# Altium PCB MAINSSMB V1.2 .PcbDoc (part 2 of 2)
Units mm, origin at the board's own origin, x right, y up, seen from the top; angles counter-clockwise.
Board outline 44.2 x 67.56 mm, 2 copper layers (Top Layer, Bottom Layer), stack 1.871 mm thick; 45 components, 33 nets, 168 pads, 12 vias.
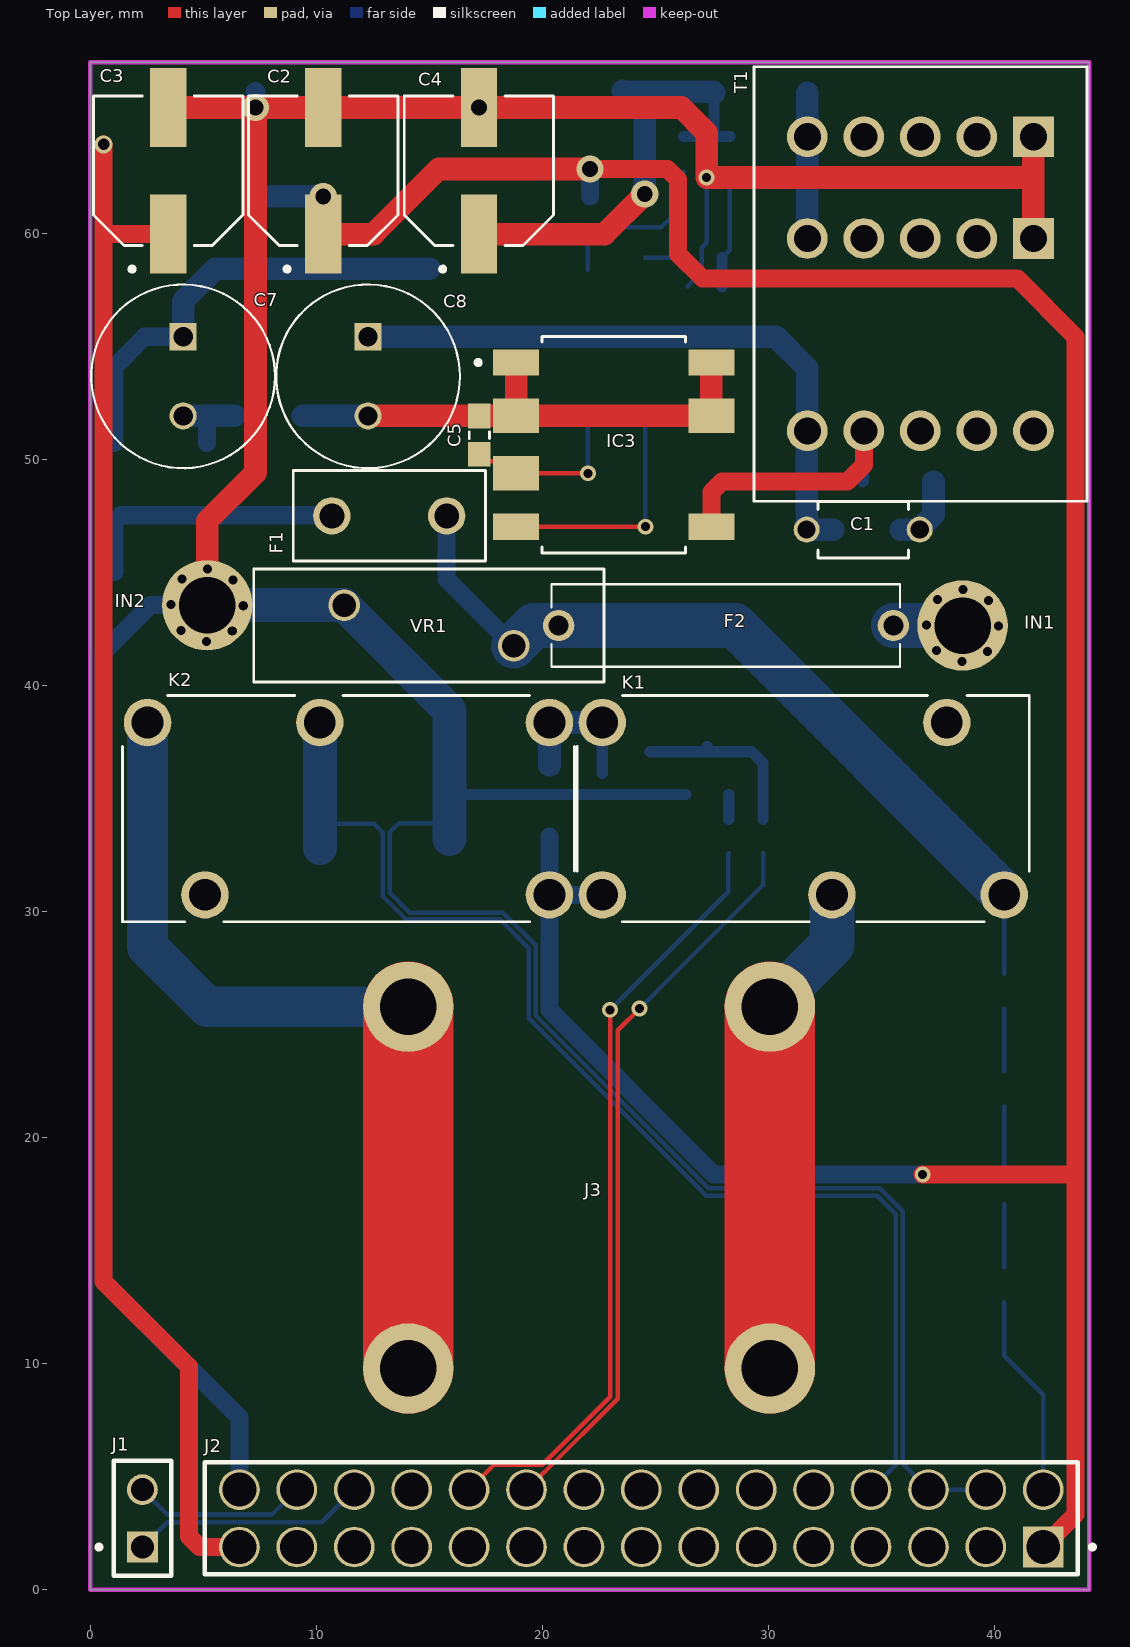
[diagram p0: Top Layer view]

## Via types
v1: diameter 0.7, hole 0.4, Top Layer to Bottom Layer, tented both sides, 6 vias
v2: diameter 1.2, hole 0.7, Top Layer to Bottom Layer, tented both sides, 5 vias
v3: diameter 0.8, hole 0.5, Top Layer to Bottom Layer, tented both sides, 1 vias

## Nets (pads, with @x,y where several pads share a name; then routed paths per layer and width w, separated by ;. In a path a pad name is that pad's centre, name@x,y a point inside that pad or via, vN(x,y) a via of type N, cw(c..) or ccw(c..) an arc to the next point about the centre after c; other vN are vias at no path point)
3V3-MAIN: C3.1 IC1.4 J2.29 | length 68.4
  Top Layer w0.8: v3(0.6,63.932) 0.6,59.919 ; C3.1 0.645,59.963 0.6,59.919 ; J2.29 4.837,1.88 4.369,2.348 4.369,9.855 0.6,13.624 0.6,59.919
5V-MAIN: C2.1 D5.K IC1.3 IC7.3 J2.01 K1.A2 K2.A1 | length 135.8
  Top Layer w0.8: v2(22.106,62.84) 25.541,62.84 26.01,62.371 26.01,59.08 27.102,57.988 41.021,57.988 43.596,55.413 43.596,18.364 ; v1(36.83,18.364) 43.596,18.364 ; J2.01 43.596,3.312 43.596,18.364
  Top Layer w1: v2(10.312,61.632) C2.1 12.542,59.963 15.418,62.84 v2(22.106,62.84)
  Bottom Layer w0.8: D5.K K2.A1 ; IC7.3 v2(22.106,62.84) ; K1.A2 20.93,30.734 K2.A1 ; v1(36.83,18.364) 27.584,18.364 20.32,25.629 K2.A1
  Bottom Layer w1: IC1.3 v2(10.312,61.632)
CUR-SHT-1: J2.08 K2.COM R17.2 R19.2 | length 55
  Bottom Layer w0.2: R19.2 10.16,33.167 10.87,33.877 12.554,33.877 12.954,33.477 12.954,30.658 13.97,29.642 18.136,29.642 19.406,28.372 19.406,25.27 27.251,17.424 34.823,17.424 35.641,16.607 35.641,5.517 J2.08
  Bottom Layer w1.5: R19.2 10.16,33.877 R17.2 K2.COM
LD-IN1: J1.02 J2.28 R9.1 | length 7.7
  Bottom Layer w0.2: J1.02 3.411,3.32 8.044,3.32 J2.28
LD-IN2: J1.01 J2.26 R9.2 | length 10.4
  Bottom Layer w0.2: J1.01 2.896,2.465 3.411,2.98 10.244,2.98 J2.26
NetC1_1: C1.1 D3.K R1.1 | length 3.2
  Bottom Layer w1: R1.1@35.862,46.888 C1.1 36.699,46.929 37.308,47.538 D3.K
NetC4_1: C4.1 D2.1 IC7.1 R2.2 R3.2 | length 20.7
  Top Layer w1: C4.1 22.76,59.963 v2(24.536,61.74)
  Bottom Layer w0.5: R2.2 R3.2 ; 27.598,64.313 D2.1
  Bottom Layer w1: IC7.1@23.554,66.308 23.599,66.263 24.46,66.263 ; v2(24.536,61.74) 24.536,66.187 24.46,66.263 ; D2.1 27.553,66.263 24.46,66.263
NetC5_1: C5.1 IC3.3 IC4.4 | length 8.1
  Top Layer w0.2: C5.1 17.53,49.911 18.316,49.911 IC3.3 v1(22.022,49.38)
  Bottom Layer w0.2: IC4.4 22.022,49.454 v1@22.073,49.403
NetC9_1: C9.1 IC4.2 IC5.2 | length 2.8
  Bottom Layer w0.2: IC4.2@24.562,58.92 C9.1 IC5.2
NetC9_2: C9.2 IC5.1 R3.1 R4.2 | length 5.3
  Bottom Layer w0.2: C9.2 28.292,59.26 IC5.1 R3.1
  Bottom Layer w0.5: R4.2 C9.2
NetD1_AC1: D1.AC1 F1.2 | length 12
  Bottom Layer w0.8: D1.AC1 1.074,45.21 1.074,47.231 1.367,47.523 F1.2@10.693,47.523
NetD2_2: D2.2 T1.5 | length 6.5
  Bottom Layer w1: T1.5@31.728,59.766 31.728,64.266 D2.2
NetD3_A: D3.A IC3.5 T1.7 | length 12.6
  Top Layer w0.8: IC3.5 27.483,48.553 27.951,49.022 33.503,49.022 34.228,49.748 T1.7
  Bottom Layer w0.5: D3.A 34.198,49.027 34.198,51.226 T1.7
NetD5_A: D5.A K1.A1 K2.A2 Q1.3 | length 6.5
  Bottom Layer w0.5: Q1.3 K1.A1
  Bottom Layer w1: D5.A K2.A2 K1.A1
NetF2_1: F2.1 IN1.1 | length 3.1
  Bottom Layer w2: F2.1 IN1.1@38.593,42.647
NetIC3_4: IC3.4 IC4.3 | length 11.2
  Top Layer w0.2: IC3.4 v1(24.562,47.018) ; v1@24.47,47.11 24.553,47.193 v1@24.689,47.193
  Bottom Layer w0.2: IC4.3 24.562,47.249 24.618,47.193 v1@24.689,47.193
NetIC4_1: IC4.1 R2.1 | length 7.8
  Bottom Layer w0.2: IC4.1 22.022,59.995 22.301,60.274 25.273,60.274 26.252,61.253 R2.1
NetJ3_1: J3.1 J3.3 K2.NO | length 38.6
  Top Layer w4: J3.3 J3.1
  Bottom Layer w1.8: K2.NO 2.54,28.423 5.183,25.78 J3.1
NetJ3_2: J3.2 J3.4 K1.COM | length 22.1
  Top Layer w4: J3.4 J3.2
  Bottom Layer w2: J3.2 32.817,28.524 K1.COM
NetQ1_1: Q1.1 Q2.3 R21.2 | length 7.9
  Bottom Layer w0.5: Q1.1 27.255,37.067 27.305,37.117 Q2.3 ; Q2.3@27.305,37.083 27.321,37.067 29.252,37.067 29.769,36.551 R21.2
NetQ2_1: Q2.1 R25.2 | length 1.1
  Bottom Layer w0.5: R25.2 Q2.1
NetR5_1: R5.1 R7.1 | length 2.8
  Bottom Layer w0.2: R5.1 R7.1
NetR5_2: R5.2 R6.1 | length 2.8
  Bottom Layer w0.2: R6.1 R5.2
NetR7_2: R7.2 R8.2 | length 2.8
  Bottom Layer w0.2: R7.2 R8.2
OFF_RELAY: J2.22 R25.1 | length 34.2
  Top Layer w0.2: J2.22 17.864,5.52 19.998,5.52 23.004,8.526 v1(23.004,25.645)
  Bottom Layer w0.2: v1(23.004,25.645) 28.225,30.867 28.225,32.54 R25.1
POWER-300V: C7.1 D1.POS L1.1 | length 20
  Bottom Layer w0.8: D1.POS 1.074,50.93 1.074,54.084 2.41,55.42 C7.1
  Bottom Layer w1: C7.1 4.115,56.998 5.537,58.42 L1.1
POWER-300V-R: C1.2 C8.1 L1.2 R1.2 T1.6 | length 28.3
  Bottom Layer w1: C8.1 L1.2 30.33,55.42 31.728,54.022 T1.6 ; T1.6@31.699,51.227 C1.2 R1.2@32.871,46.888
POWER-GND: C7.2 D1.NEG L2.1 | length 3.5
  Bottom Layer w0.8: D1.NEG 5.174,50.93 5.174,51.92
  Bottom Layer w1: C7.2 5.174,51.92 L2.1
POWER-GND-R: C5.2 C8.2 IC3.1 IC3.2 IC3.7 IC3.8 L2.2 | length 22.8
  Top Layer w1: C8.2 C5.2 IC3.2 ; IC3.1 IC3.2 ; IC3.8 IC3.7 IC3.2
  Bottom Layer w1: L2.2 C8.2
POWER_L: C2.2 C3.2 C4.2 D1.AC2 IC1.1 IC5.3 IC7.2 IN2.1 J2.04 J2.06 J2.30 Q1.2 Q2.2 R4.1 R17.1 R19.1 T1.1 VR1.1 | length 197.4
  Top Layer w1: C3.2 v2(7.317,65.563) ; IN2.1@5.174,43.547 5.174,47.262 7.317,49.405 v2(7.317,65.563) ; T1.1@41.728,59.766 41.728,62.484 ; T1.1@41.728,64.266 41.728,62.484 ; v2(7.317,65.563) C2.2 26.156,65.563 27.272,64.448 v1(27.272,62.465) 41.709,62.465 41.728,62.484
  Bottom Layer w0.2: R19.1 15.906,33.199 15.196,33.909 13.665,33.909 13.254,33.498 13.254,30.833 14.145,29.942 17.81,29.942 18.26,29.942 19.706,28.496 19.706,28.046 19.706,25.394 27.345,17.755 34.925,17.755 35.941,16.739 35.941,5.563 J2.06 J2.04 ; R4.1 26.442,57.663 27.06,58.28 27.06,59.361 27.272,59.573 v1(27.272,62.465)
  Bottom Layer w0.5: R17.1@16.466,35.167 Q1.2 Q2.2
  Bottom Layer w0.8: IN2.1@5.174,43.547 2.678,43.547 0.6,41.469 0.6,13.624 6.604,7.62 J2.30
  Bottom Layer w0.9: v2(7.317,65.563) IC1.1
  Bottom Layer w1.5: IN2.1@6.774,43.547 VR1.1 15.906,38.877 15.906,35.281 15.906,33.909 R19.1@15.906,33.199
  other v2: 17.196,65.563
POWER_N: F1.1 F2.2 K1.NO R8.1 VR1.2 | length 37.5
  Bottom Layer w0.2: R8.1 K1.NO
  Bottom Layer w0.8: F1.1 15.773,44.709 VR1.2
  Bottom Layer w2: VR1.2 19.636,42.647 28.524,42.647 K1.NO
POWER_N_D: J2.02 R6.2 | length 9
  Bottom Layer w0.2: R6.2 40.437,10.338 42.164,8.611 J2.02
RELAY: J2.20 R21.1 | length 32.5
  Top Layer w0.2: J2.20 20.104,5.22 20.122,5.22 23.343,8.44 23.343,24.74 v1(24.308,25.705)
  Bottom Layer w0.2: v1(24.308,25.705) 25.764,27.161 29.769,31.166 R21.1
pads on no net: IC1.2 J2.03 J2.05 J2.07 J2.09 J2.10 J2.11 J2.12 J2.13 J2.14 J2.15 J2.16 J2.17 J2.18 J2.19 J2.21 J2.23 J2.24 J2.25 J2.27 K1.NC K2.NC T1.2 T1.3 T1.4 T1.8 T1.9 T1.10

## Keep-outs
Keep-Out Layer:
  the board outline again, w0.2

## Silkscreen, mask and mechanical layers (free items; w line width, h text height)
Bottom Overlay:
  drawing of 16 lines, arcs and shapes, not listed
  text "TVBac" at 17.577,12.746 h2